# EAGLE board matinimas (EAGLE 6.5.0)

Size 154.92 x 68.25 mm. Coordinates in mm from the lower left corner, seen from the top.
Outline: 0,0 154.92,0 154.92,68.25 0,68.25 0,0
Copper layers (1*16): Top 0.035mm / dielectric 1.5mm / Bottom 0.035mm
Design rules "default *": minimum track width 10mil, minimum drill 24mil, track to track 16mil, track to pad 16mil, pad to pad 16mil, via to via 16mil, smd to smd 8mil, copper to edge 40mil, drill to drill 8mil, minimum pad ring 0.4mm, minimum via ring 0.8mm, stop-mask expansion 4mil, vias tented up to drill 0mil, thermal gap 10mil
Net classes: 0 default: width 1 mm; 1 Ground: width 1 mm; 2 fat: width 2 mm
Holes 0.6 mm at 3.81,64.77 3.81,2.54 151.13,48.26 137.16,6.35 106.68,64.77
tRestrict: area 97.8,52.1 to 99.1,54.6

## Footprints (pad centres in the part's own frame; a part is rotated, then mirrored left to right if it is on the bottom)
DO41-10 = drill 1.118: A 5.08,0; C -5.08,0
G5V1 = drill 0.813 long: 1 -5.08,-2.54; 2 -2.54,-2.54; 5 5.08,-2.54; 6 5.08,2.54; 9 -2.54,2.54; 10 -5.08,2.54
LED5MM = drill 0.813 octagon: A -1.27,0; K 1.27,0
DIP4 = drill 0.8: 1 -1.27,-3.81; 2 1.27,-3.81; 3 1.27,3.81; 4 -1.27,3.81
0204/7 = drill 0.813 octagon: 1 -3.81,0; 2 3.81,0
F/CM12P = drill 1.016 pad 2.54 octagon: + 3.81,0; - -3.81,0
TO92-EBC = drill 0.813 long: B 0,-1.27; C 2.54,-1.27; E -2.54,-1.27
DS1820 = drill 0.8: DQ 2.54,-1.27; GND 0.635,-1.27; VDD 4.445,-1.27
USB = drill 1: 1 -3.5,12.99; 2 -1,12.99; 3 1,12.99; 4 3.5,12.99 | hole 2.3: -6.57,10.28; 6.57,10.28
AK500/2 = drill 1.321 long: 1 -2.515,0; 2 2.515,0
057-040-0 = drill 1 octagon: 1 -24.13,-5.08; 2 -24.13,-2.54; 3 -21.59,-5.08; 4 -21.59,-2.54; 5 -19.05,-5.08; 6 -19.05,-2.54; 7 -16.51,-5.08; 8 -16.51,-2.54; 9 -13.97,-5.08; 10 -13.97,-2.54; 11 -11.43,-5.08; 12 -11.43,-2.54; 13 -8.89,-5.08; 14 -8.89,-2.54; 15 -6.35,-5.08; 16 -6.35,-2.54; 17 -3.81,-5.08; 18 -3.81,-2.54; 19 -1.27,-5.08; 20 -1.27,-2.54; 21 1.27,-5.08; 22 1.27,-2.54; 23 3.81,-5.08; 24 3.81,-2.54; 25 6.35,-5.08; 26 6.35,-2.54; 27 8.89,-5.08; 28 8.89,-2.54; 29 11.43,-5.08; 30 11.43,-2.54; 31 13.97,-5.08; 32 13.97,-2.54; 33 16.51,-5.08; 34 16.51,-2.54; 35 19.05,-5.08; 36 19.05,-2.54; 37 21.59,-5.08; 38 21.59,-2.54; 39 24.13,-5.08; 40 24.13,-2.54 | hole 2.8: -32.53,3.66; 32.78,3.66
3POL254 = drill 1.2 long: 1 -2.54,0; 2 0,0; 3 2.54,0

## Placement (x,y rotation side)
D2  1N4004  [DO41-10]  121.92,19.05 270 top
K1  G5V1  [G5V1]  132.08,15.24 90 top
LED1  [LED5MM]  -54.61,-44.45 0 top  (outside the outline)
LED2  [LED5MM]  97.79,25.4 180 top
OK2  SFH618A-2  [DIP4]  44.45,10.16 90 top
R1  10K  [0204/7]  -53.34,-33.02 0 top  (outside the outline)
R2  1.5K  [0204/7]  -53.34,-50.8 0 top  (outside the outline)
R3  1.5K  [0204/7]  54.61,15.24 90 top
R4  1.3K  [0204/7]  100.33,13.97 90 top
R5  10K  [0204/7]  31.75,38.1 0 top
R6  10K  [0204/7]  50.8,34.29 90 top
R7  10K  [0204/7]  29.21,12.7 180 top
R9  330  [0204/7]  106.68,20.32 90 top
R10  10K  [0204/7]  57.15,35.56 90 top
R11  4.7K  [0204/7]  96.52,45.72 180 top
R12  1.3K  [0204/7]  127,40.64 180 top
SG1  F/CM12P  [F/CM12P]  35.56,22.86 0 top
T1  2SC1213  [TO92-EBC]  88.9,17.78 270 top
T2  2SC1213  [TO92-EBC]  115.57,16.51 0 top
U$1  DS1820TO92  [DS1820]  99.06,38.1 180 top
U$2  DS1820TO92  [DS1820]  99.06,52.07 180 top
X1  [USB]  153.67,57.15 90 top
X2  [AK500/2]  5.08,50.8 90 top
X3  [AK500/2]  5.08,34.29 90 top
X4  [AK500/2]  5.08,22.86 90 top
X5  [AK500/2]  -7.62,6.35 0 top  (outside the outline)
X6  [AK500/2]  5.08,11.43 90 top
X7  [AK500/2]  118.11,5.08 0 top
X8  [AK500/2]  -19.05,6.35 0 top  (outside the outline)
X9  [AK500/2]  -30.48,6.35 0 top  (outside the outline)
X10  [AK500/2]  -41.91,6.35 0 top  (outside the outline)
X11  [AK500/2]  -53.34,6.35 0 top  (outside the outline)
X12  057-040-0  [057-040-0]  -24.13,-6.35 0 top
X13  [3POL254]  -53.34,-38.1 0 top  (outside the outline)

## Library data of the parts
D2 = diode
K1 = relay; MPN: G5V-1-DC24; OC_FARNELL: 9949593; OC_NEWARK: 36M6377
LED1 LED2 = led
OK2 = optocoupler; MF: VISHAY/TELEFUNKEN; MPN: SFH618A-2; OC_FARNELL: 6424855; OC_NEWARK: 21H7744
R1-R7 R9-R12 = resistor
SG1 = buzzer; OC_FARNELL: unknown; OC_NEWARK: unknown
T1 T2 = transistor
U$1 U$2 = Ava
X1 = con-amp
X2-X11 = con-ptr500; OC_FARNELL: unknown; OC_NEWARK: unknown
X12 = con-panduit; OC_FARNELL: unknown; OC_NEWARK: unknown
X13 = con-phoenix-254; OC_FARNELL: unknown; OC_NEWARK: unknown

## Nets
GND [fat]: LED2.K OK2.2 OK2.3 R2.2 T1.E T2.E U$1.GND U$2.GND X1.4 X2.2 X3.1 X4.1 X5.1 X6.1 X7.1 X8.1 X9.1 X10.1 X11.1 X12.6 X13.1
N$1: LED1.A R3.2 X2.1 X5.2
N$2: R12.2 T2.B
N$3 [fat]: D2.A K1.9 T2.C
N$4 [fat]: K1.6 X8.2 X9.2 X10.2 X13.2
N$5: R1.1 X12.39 X13.3
N$6: R4.1 X12.11
N$7: LED1.K R2.1
N$8: OK2.1 R3.1
N$9: OK2.4 R7.1 X12.18
N$10: R4.2 T1.B
N$12: SG1.+ T1.C
N$13: R5.1 X3.2 X12.13
N$15: R6.1 X4.2 X12.15
N$16: LED2.A R9.2
N$17: R9.1 X12.12
N$18: R10.1 X6.2 X12.22
N$19: R11.1 U$1.DQ U$2.DQ X12.7
N$20: R11.2 U$1.VDD U$2.VDD X12.1
N$21: R12.1 X12.16
N$22 [fat]: D2.C K1.2 R5.2 R6.2 R7.2 R10.2 SG1.- X1.1 X11.2
N$23: K1.10 X7.2

## Tracks (layer width: path | path; a pad name or v marks a point on that pad's centre or on a via)
GND  (20 unrouted)
N$1  (3 unrouted)
N$2  (1 unrouted)
N$3  (2 unrouted)
N$4  (4 unrouted)
N$5  (2 unrouted)
N$6  (1 unrouted)
N$7  (1 unrouted)
N$8  (1 unrouted)
N$9  (2 unrouted)
N$10  (1 unrouted)
N$12  (1 unrouted)
N$13  (2 unrouted)
N$15  (2 unrouted)
N$16  (1 unrouted)
N$17  (1 unrouted)
N$18  (2 unrouted)
N$19  (3 unrouted)
N$20  (3 unrouted)
N$21  (1 unrouted)
N$22  (8 unrouted)
N$23  (1 unrouted)

## Text on the board
Top: AntiBurglarPiLite v0.1 2016.11.11